# Altium PCB ElectronBot.PcbDoc
Units mil, origin at the board's own origin, x right, y up, seen from the top; angles counter-clockwise.
Board outline 1479.69 x 1548.74 mil, 2 copper layers (Top1, Bottom2), stack 42.17 mil thick; 69 components, 72 nets, 328 pads, 93 vias.
Unrouted connection lines stored in the file: 11.
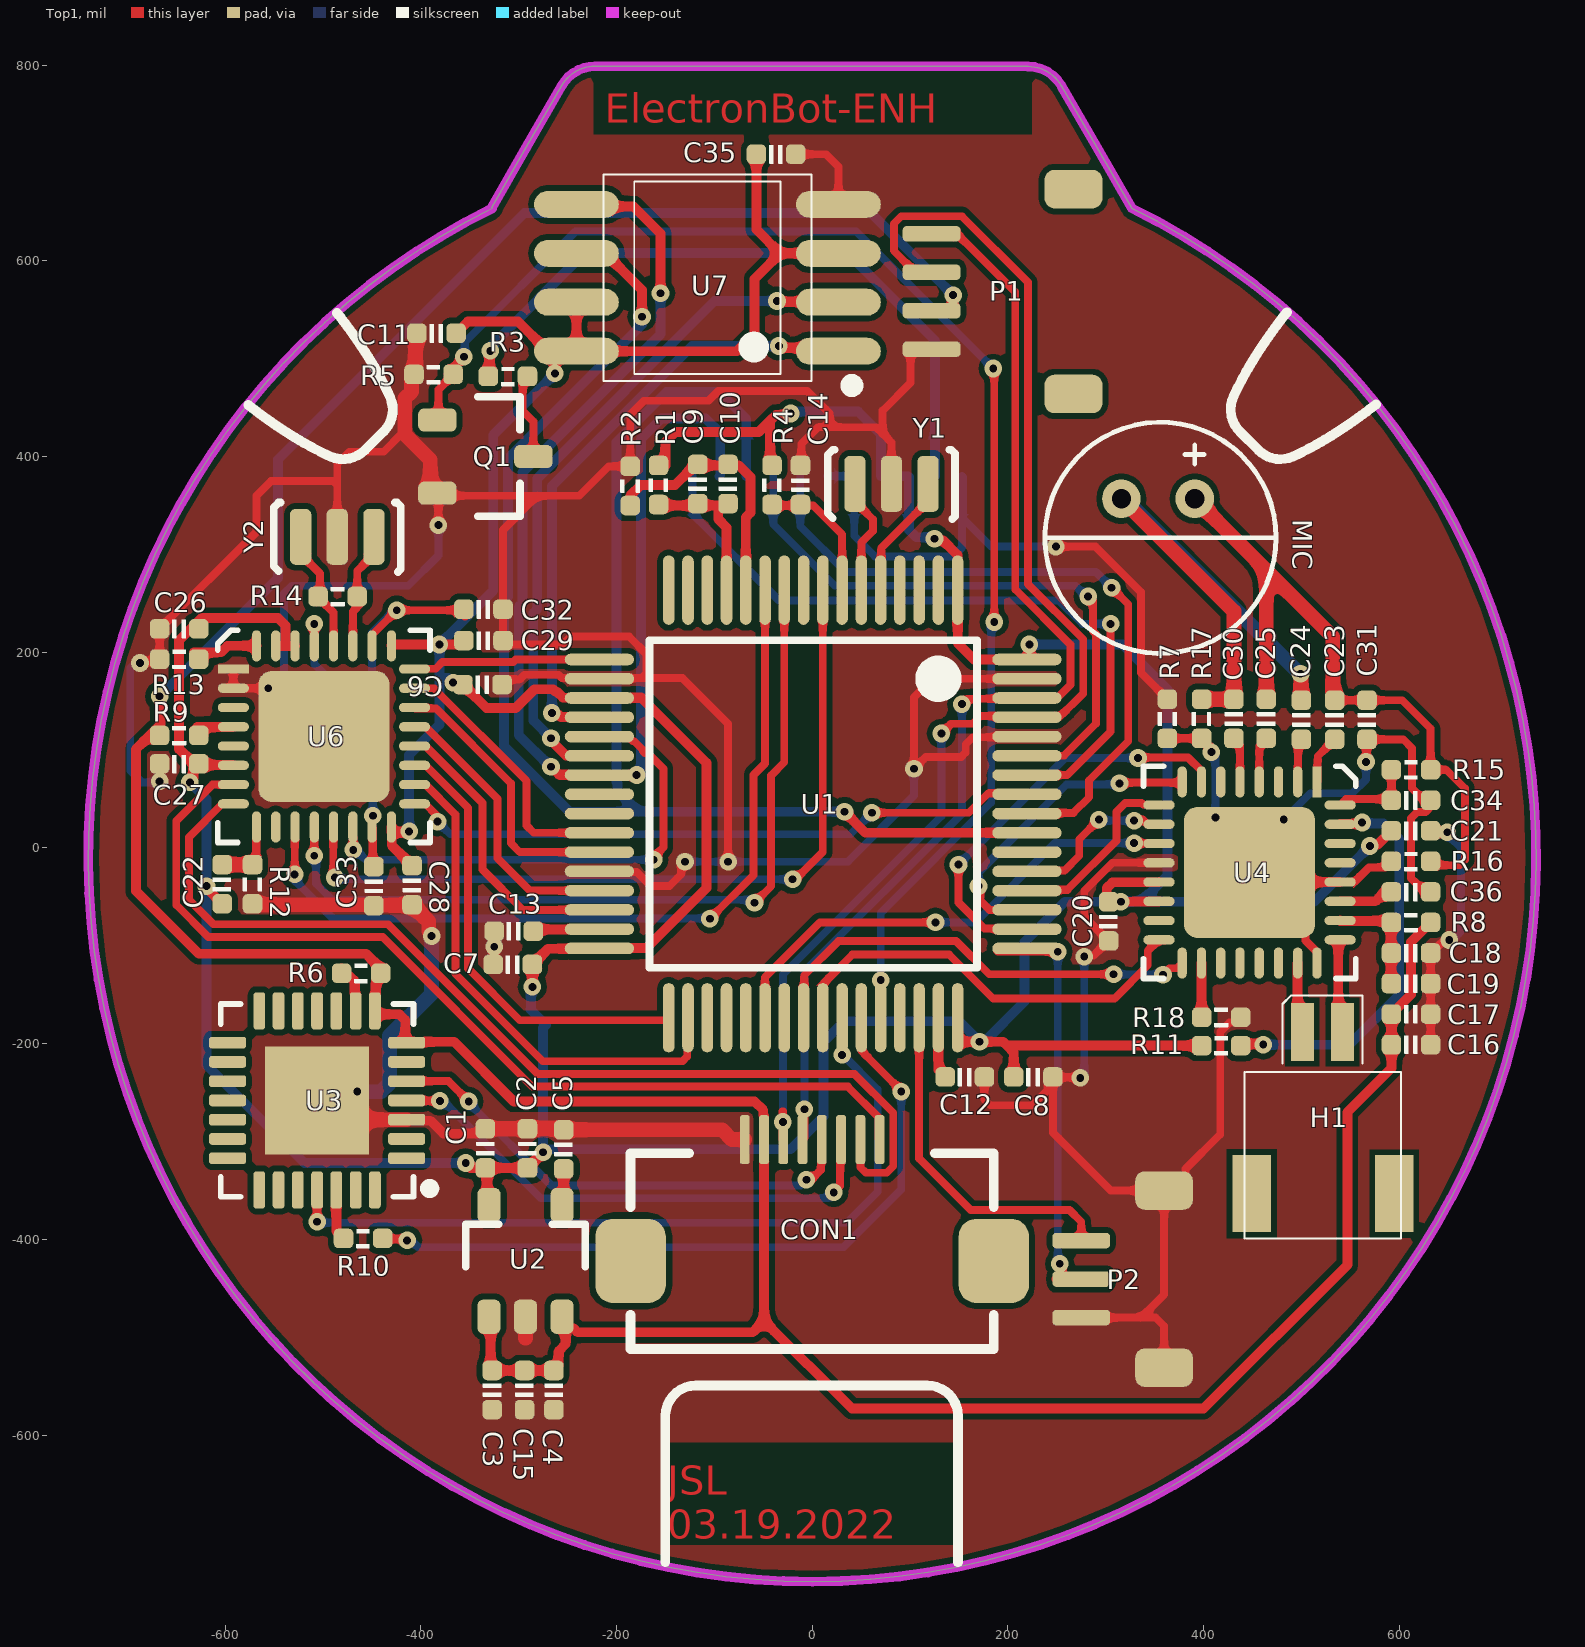
[diagram p0: Top1 view]
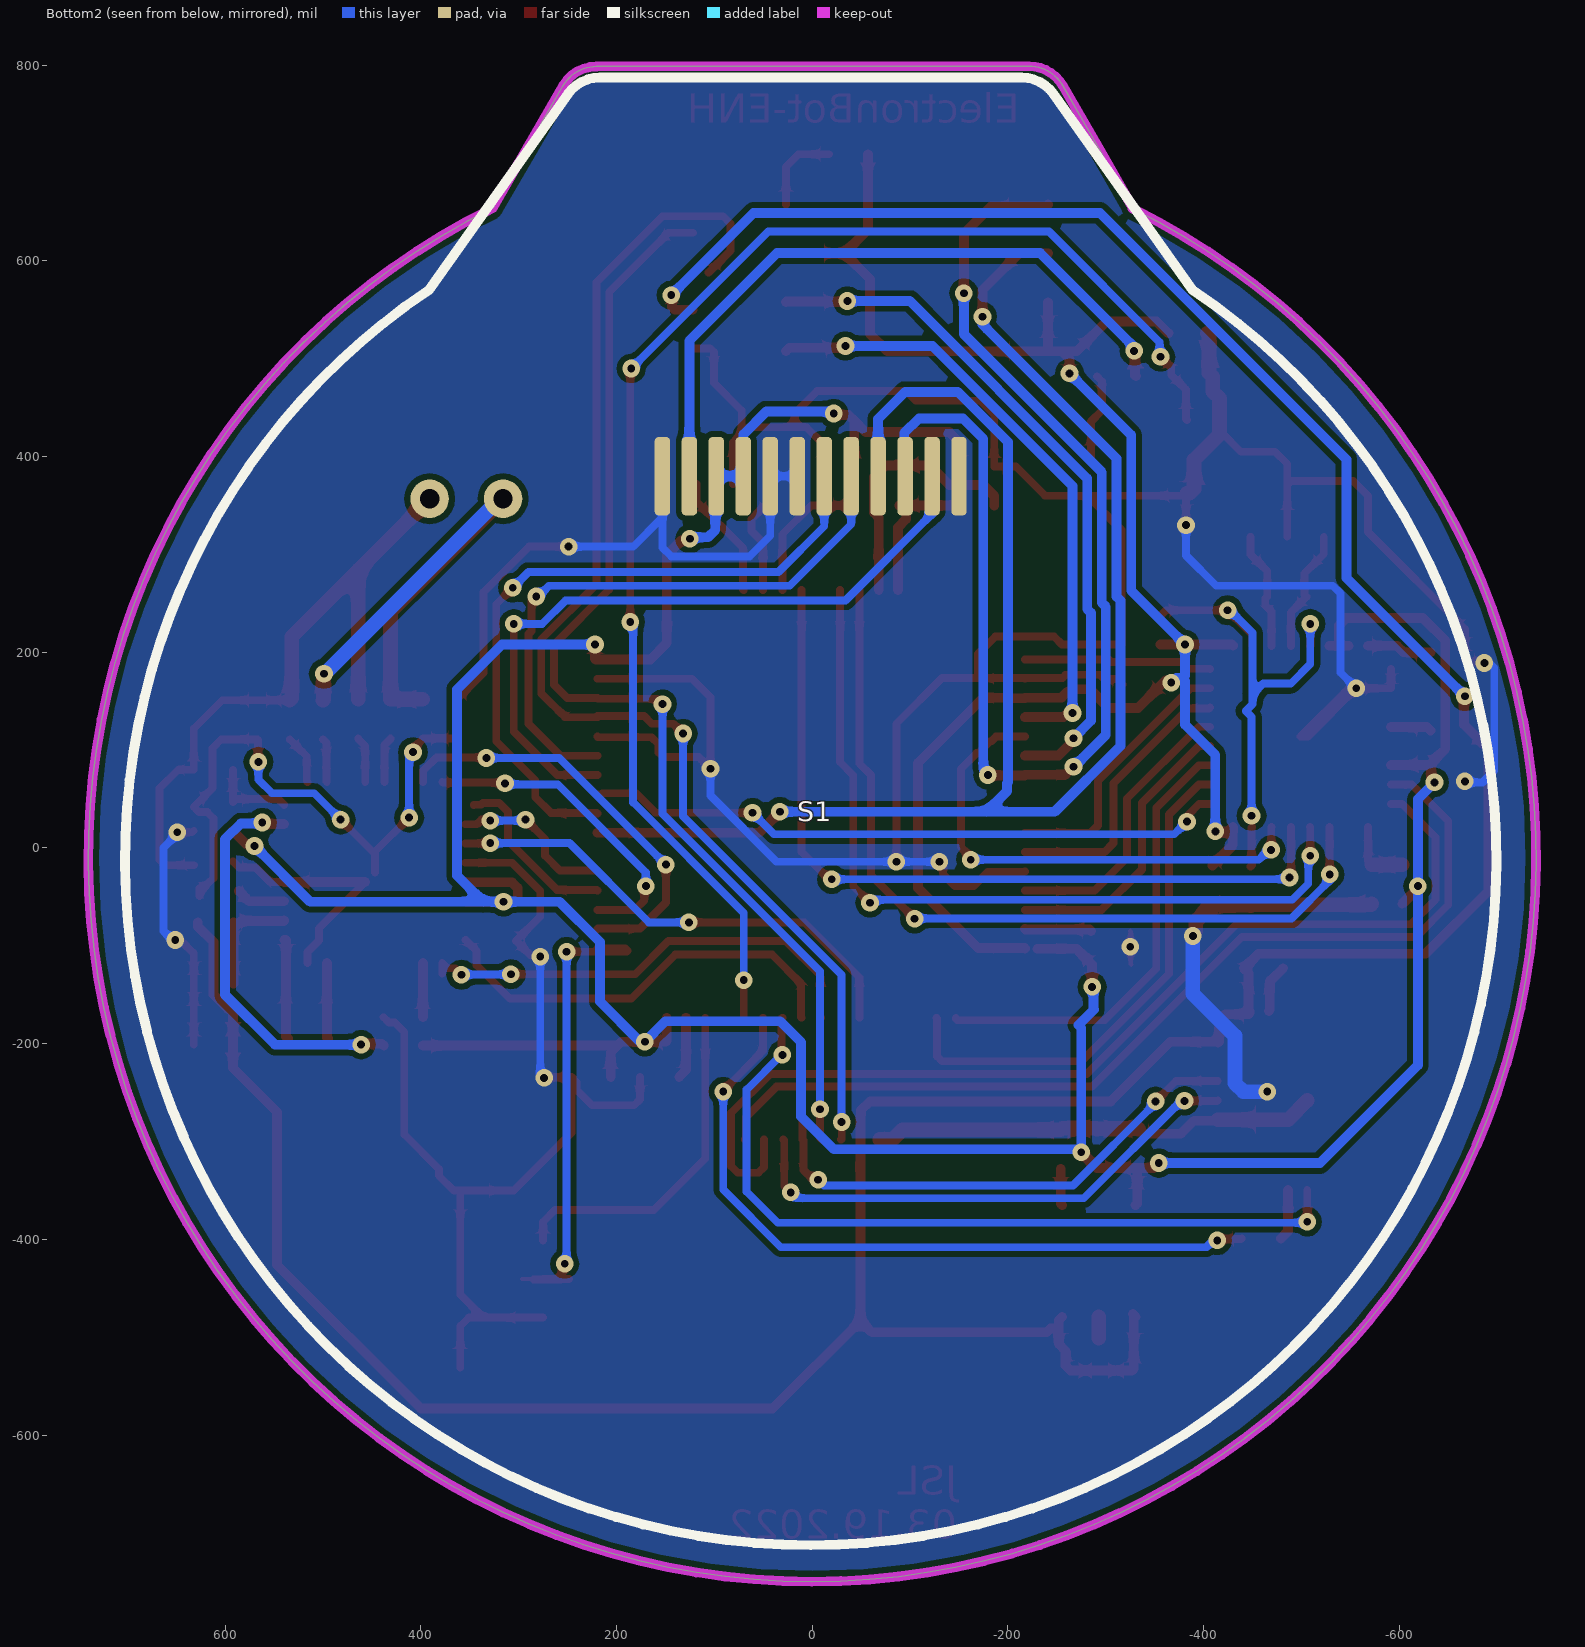
[diagram p1: Bottom2 view, seen from below]

## Layer stack, top to bottom
Top Solder: solder mask 0.4, Solder Resist, Dk 3.5
Top1: signal copper 1.4
Dielectric 1: prepreg 39.3701, PP-006, Dk 4.1
Bottom2: signal copper 1.4
Bottom Solder: solder mask 0.4, Solder Resist, Dk 3.5

## Board outline
-327.58,654.33 -292.13,716.15 -256.03,779.09 cw(c-221.88,759.5) -221.87,798.87 220.56,798.71 cw(c220.54,759.34) 254.64,779.01 290.88,716.22 326.65,654.22 326.51,653.93 cw(c0,-10)

## Design rules (kind name [scope] priority, off if disabled: settings)
Clearance Clearance_Logo [InNetClass('Logo')] p1: gap=8 ignorepadtopadclearanceinfootprint=FALSE
Clearance [All] p2: gap=5 ignorepadtopadclearanceinfootprint=FALSE
ComponentClearance [All] p1: gap=0 collisioncheckmode=3 verticalgap=0 showdistances=FALSE
DiffPairsRouting [All] p1: maxlimit=9 minlimit=9 mostfreqgap=9 toplayer_minwidth=15 toplayer_maxwidth=15 toplayer_prefwidth=15 bottomlayer_minwidth=15 bottomlayer_maxwidth=15 bottomlayer_prefwidth=15 maxuncoupledlength=500
FanoutControl Fanout_BGA [All] p1: bgadir=Out bgaviamode=Centered fanoutstyle=Auto fanoutdirection=Alternating viagrid=1 // Fanout_BGA (Default Rule)
HoleSize [All] p1: absolutevalues=TRUE maxlimit=10000 minlimit=8 maxpercent=80.000 minpercent=20.000
MinimumSolderMaskSliver [All] p1 off: minsoldermaskwidth=2
PlaneClearance [All] p1: clearance=8
PlaneConnect [All] p1: planeconnectstyle=Direct reliefexpansion=20 reliefentries=4 reliefconductorwidth=10 reliefairgap=10
PolygonConnect [All] p1: connectstyle=Direct reliefconductorwidth=10 reliefentries=4 polygonreliefangle="90 Angle" airgapwidth=10
RoutingVias [All] p1: holewidth=8 width=16 viastyle="Through Hole" minholewidth=6 minwidth=12 maxholewidth=28 maxwidth=50
SilkToSilkClearance [All] p1: silktosilkclearance=0
SilkToSolderMaskClearance [IsPad] p1: minsilkscreentomaskgap=0 clearancetoexposedcopper=TRUE
SolderMaskExpansion [All] p1: expansion=3
Width Logo [InNetClass('Logo')] p1: maxlimit=100 minlimit=0.1 preferedwidth=10
Width GND [(InNet('AGND') OR InNet('GND'))] p2: maxlimit=50 minlimit=4 preferedwidth=10
Width VCC [(InNet('VDD_SYS_3.3V') OR InNet('VDD_AV_3.3V') OR InNet('VDD_5V') OR InNet('VDD1V2-SYS') OR InNet('VDD1V1-EPHY') OR InNet('VDD-CPUX') OR InNet('VDD-CPUS') OR InNet('VDD-CPUFB') OR InNet('VCC-DRAM'))] p3: maxlimit=50 minlimit=4 preferedwidth=10
Width [All] p4: maxlimit=10000 minlimit=4 preferedwidth=4
21 further rules are at their usual default settings.

## Components (designator, comment, footprint, x,y, rotation, side; value= is the part's Value field where it differs from the comment)
C1 "0.1uF" CAP_0402 -334,-307 r270 top value=0.1u
C2 "10uF" CAP_0402 -291,-307 r270 top value=0.1u
C3 "10uF" CAP_0402 -327,-554 r90 top value=0.1u
C4 "0.1uF" CAP_0402 -264,-554 r90 top value=0.1u
C5 "10nF" CAP_0402 -254,-308 r270 top value=0.1u
C6 "0.1uF" CAP_0402 -337,167 r180 top value=0.1u
C7 "0.1uF" CAP_0402 -306,-119 r0 top value=0.1u
C8 "0.1uF" CAP_0402 226,-234 r180 top value=0.1u
C9 "0.1uF" CAP_0402 -117,372 r270 top value=0.1u
C10 "10uF" CAP_0402 -86,372 r270 top value=0.1u
C11 "0.1uF" CAP_0402 -384,526 r0 top value=0.1u
C12 "10uF" CAP_0402 156,-234 r180 top value=0.1u
C13 "10uF" CAP_0402 -305,-85 r0 top value=0.1u
C14 "0.1uF" CAP_0402 -12,371 r270 top value=0.1u
C15 "10uf" CAP_0402 -294,-554 r270 top value=0.1u
C16 "10uf" CAP_0402 612,-201 r0 top value=0.1u
C17 "0.1uF" CAP_0402 612,-169.78 r0 top value=0.1u
C18 "10uf" CAP_0402 612,-107.33 r180 top value=0.1u
C19 "0.1uF" CAP_0402 612,-138.56 r180 top value=0.1u
C20 "10uf" CAP_0402 303,-75 r90 top value=0.1u
C21 "0.1uF" CAP_0402 612,17.56 r180 top value=0.1u
C22 "10nF" CAP_0402 -603,-37 r90 top value=0.1u
C23 "1uF" CAP_0402 534,131 r90 top value=0.1u
C24 "1uF" CAP_0402 500,131 r90 top value=0.1u
C25 "1uF" CAP_0402 464,132 r90 top value=0.1u
C26 "0.1uF" CAP_0402 -647,224 r180 top value=0.1u
C27 "0.1uF" CAP_0402 -647,86 r180 top value=0.1u
C28 "0.1uF" CAP_0402 -409,-38 r270 top value=0.1u
C29 "0.1uF" CAP_0402 -336,212 r0 top value=0.1u
C30 "1uF" CAP_0402 431,132 r90 top value=0.1u
C31 "220pf" CAP_0402 567,131 r90 top value=0.1u
C32 "10uF" CAP_0402 -336,244 r0 top value=0.1u
C33 "0.1uF" CAP_0402 -448,-39 r270 top value=0.1u
C34 "10uF" CAP_0402 612,48.78 r0 top value=0.1u
C35 "0.1uF" CAP_0402 -37,709 r0 top value=0.1u
C36 "10uF" CAP_0402 612,-44.89 r0 top value=0.1u
CON1 "FFC_0.5_8" FFC_0.5_8 0,-387 r0 top
H1 "HEADER-2P" header2p_1.0 521.96,-309.06 r0 top
MIC "MIC" MIC6*2.2 356,317 r0 top (schematic designator U5)
P1 "SH1.0-4P" SH1.0-4P 122,568.69 r90 top
P2 "SH1.0-3P-STAND" SH1.0-3P-STAND 275,-440.63 r90 top
Q1 "AO3400A" SOT23-3 -334,400 r0 top
R1 "0R" RES_0402 -157,371 r90 top value=22R
R2 "0R" RES_0402 -186,370 r90 top value=22R
R3 "10R" RES_0402 -311,482 r180 top value=22R
R4 "10K" RES_0402 -41,371 r90 top value=22R
R5 "10K" RES_0402 -387,484 r0 top value=22R
R6 "10K" RES_0402 -461,-128 r180 top value=22R
R7 "0R" RES_0402 363,132 r90 top value=22R
R8 "0R" RES_0402 612,-76.11 r0 top value=22R
R9 "0R" RES_0402 -647,115 r0 top value=22R
R10 "200R" RES_0402 -459,-399 r180 top value=22R
R11 "0R" RES_0402 418,-202 r180 top value=22R
R12 "10K" RES_0402 -572,-37 r270 top value=22R
R13 "12K" RES_0402 -647,193 r180 top value=22R
R14 "1M" RES_0402 -485,257 r0 top value=22R
R15 "680R" RES_0402 612,80 r180 top value=22R
R16 "47K" RES_0402 612,-13.67 r180 top value=22R
R17 "0R" RES_0402 398,132 r270 top value=22R
R18 "10K" RES_0402 418,-173 r0 top value=22R
S1 "LCD-240x240-ROUND" LCD-240x240-ROUND 1.54,62.44 r0 bottom
U1 "STM32F405RGT6" LQFP-64_N 1,45 r270 top
U2 "LP2992 3V3" SOT23-5 -293,-420 r90 top
U3 "CP2102" QFN-28 -506,-258 r180 top value=Value
U4 "WM8978" QFN-32 447,-25 r270 top
U6 "USB3300-EZK-TR" QFN-32 -499,114 r0 top
U7 "W25Q256" flash -108,579 r180 top
Y1 "8MHz" 晶振-3P 81,372 r180 top
Y2 "24MHz" 晶振-3P -485.4,318 r180 top

## Footprints (in the part's own frame and the unit in brackets; to place one, negate y for a bottom-side part, rotate by r counter-clockwise, add the part's x,y. Pads: shape width x height; smd on the part's side, far side on the other; paste and mask are expansions set on the pad)
CAP_0402 [mil]
  rrect50% 20x20 smd: 1(-20,0) 2(20,0)
  silkscreen extent -7,-9 7,9, body extent -20,-10 20,10, height 20
FFC_0.5_8 [mil]
  rrect50% 72x86 smd: 0(-185.63,-35) 0(185.63,-35)
  rrect50% 10x50 smd: 1(-68.9,89) 2(-49.21,89) 3(-29.53,89) 4(-9.84,89) 5(9.84,89) 6(29.53,89) 7(49.21,89) 8(68.9,89)
  silkscreen extent -186,-125 186,75, body extent -187,-124 187,87, height 82
flash [mm]
  oval 2.2x0.7 smd: 1(-3.424,1.809) 2(-3.424,0.539) 3(-3.424,-0.731) 4(-3.424,-2.001) 5(3.376,-2.001) 6(3.376,-0.731) 7(3.376,0.539) 8(3.376,1.809)
  silkscreen extent -3.92,-2.77 2.68,2.85
header2p_1.0 [mm]
  rect 1x2 smd: 0(-1.85,-1.125) 0(1.85,-1.125)
  rect 0.6x1.5 smd: 1(-0.532,3.075) 2(0.509,3.075)
  silkscreen extent -2.03,-2.29 2.03,4.03
LCD-240x240-ROUND [mm]
  rrect50% 0.4x2.032 smd: 1(3.85,-8.066) 2(3.15,-8.066) 3(2.45,-8.066) 4(1.75,-8.066) 5(1.05,-8.066) 6(0.35,-8.066) 7(-0.35,-8.066) 8(-1.05,-8.066) 9(-1.75,-8.066) 10(-2.45,-8.066) 11(-3.15,-8.066) 12(-3.85,-8.066)
  silkscreen extent -17.8,-18.42 17.8,19.69, body extent -17.8,-18.41 17.8,19.68
LQFP-64_N [mm]
  oval 1.8x0.3 smd: 1(-5.55,3.75) 2(-5.55,3.25) 3(-5.55,2.75) 4(-5.55,2.25) 5(-5.55,1.75) 6(-5.55,1.25) 7(-5.55,0.75) 8(-5.55,0.25) 9(-5.55,-0.25) 10(-5.55,-0.75) 11(-5.55,-1.25) 12(-5.55,-1.75) 13(-5.55,-2.25) 14(-5.55,-2.75) 15(-5.55,-3.25) 16(-5.55,-3.75) 33(5.55,-3.75) 34(5.55,-3.25) 35(5.55,-2.75) 36(5.55,-2.25) 37(5.55,-1.75) 38(5.55,-1.25) 39(5.55,-0.75) 40(5.55,-0.25) 41(5.55,0.25) 42(5.55,0.75) 43(5.55,1.25) 44(5.55,1.75) 45(5.55,2.25) 46(5.55,2.75) 47(5.55,3.25) 48(5.55,3.75)
  oval 0.3x1.8 smd: 17(-3.75,-5.55) 18(-3.25,-5.55) 19(-2.75,-5.55) 20(-2.25,-5.55) 21(-1.75,-5.55) 22(-1.25,-5.55) 23(-0.75,-5.55) 24(-0.25,-5.55) 25(0.25,-5.55) 26(0.75,-5.55) 27(1.25,-5.55) 28(1.75,-5.55) 29(2.25,-5.55) 30(2.75,-5.55) 31(3.25,-5.55) 32(3.75,-5.55) 49(3.75,5.55) 50(3.25,5.55) 51(2.75,5.55) 52(2.25,5.55) 53(1.75,5.55) 54(1.25,5.55) 55(0.75,5.55) 56(0.25,5.55) 57(-0.25,5.55) 58(-0.75,5.55) 59(-1.25,5.55) 60(-1.75,5.55) 61(-2.25,5.55) 62(-2.75,5.55) 63(-3.25,5.55) 64(-3.75,5.55)
  silkscreen extent -4.25,-4.25 4.25,4.25, body extent -5.99,-5.99 5.98,5.98, height 1.6
MIC6*2.2 [mm]
  round 1 hole 0.5: 1(0.889,1.016) 2(-1.016,1.016)
  silkscreen extent -3,-3 3,3
QFN-28 [mil]
  rrect50% 38x12 smd mask+5: 1(-91.5,59.06) 2(-91.5,39.37) 3(-91.5,19.68) 4(-91.5,0) 5(-91.5,-19.68) 6(-91.5,-39.37) 7(-91.5,-59.06) 15(91.5,-59.06) 16(91.5,-39.37) 17(91.5,-19.68) 18(91.5,0) 19(91.5,19.68) 20(91.5,39.37) 21(91.5,59.06)
  rrect50% 12x38 smd mask+5: 8(-59.06,-91.5) 9(-39.37,-91.5) 10(-19.69,-91.5) 11(0,-91.5) 12(19.68,-91.5) 13(39.37,-91.5) 14(59.06,-91.5) 22(59.06,91.5) 23(39.37,91.5) 24(19.68,91.5) 25(0,91.5) 26(-19.69,91.5) 27(-39.37,91.5) 28(-59.06,91.5)
  rect 106.3x110.24 smd: 29(0,0)
  silkscreen extent -120,-99 99,99, body extent -99,-99 98,98, height 35
QFN-32 [mm]
  rect 0.81x0.239 smd paste+0 mask+0: 1(-2.351,1.75)
  rrect100% 0.81x0.239 smd paste+0 mask+0: 2(-2.351,1.25) 3(-2.351,0.75) 4(-2.351,0.25) 5(-2.351,-0.25) 6(-2.351,-0.75) 7(-2.351,-1.25) 8(-2.351,-1.75) 17(2.351,-1.75) 18(2.351,-1.25) 19(2.351,-0.75) 20(2.351,-0.25) 21(2.351,0.25) 22(2.351,0.75) 23(2.351,1.25) 24(2.351,1.75)
  rrect100% 0.239x0.81 smd paste+0 mask+0: 9(-1.75,-2.351) 10(-1.25,-2.351) 11(-0.75,-2.351) 12(-0.25,-2.351) 13(0.25,-2.351) 14(0.75,-2.351) 15(1.25,-2.351) 16(1.75,-2.351) 25(1.75,2.351) 26(1.25,2.351) 27(0.75,2.351) 28(0.25,2.351) 29(-0.25,2.351) 30(-0.75,2.351) 31(-1.25,2.351) 32(-1.75,2.351)
  rrect20% 3.4x3.4 smd paste-1000 mask+0: 33(0,0)
  silkscreen extent -2.76,-2.76 2.76,2.76, body extent -2.51,-2.51 2.51,2.51, height 0.85
RES_0402 [mil]
  rrect50% 20x20 smd: 1(-20,0) 2(20,0)
  silkscreen extent -7,-10 7,10, body extent -20,-10 20,10, height 14
SH1.0-3P-STAND [mm]
  rrect50% 0.4x1.5 smd: 1(-1,0) 2(0,0) 3(1,0)
  rrect50% 1x1.5 smd: SH1(-2.3,-2.15) SH2(2.3,-2.15)
  body extent -2.5,-2.91 2.5,0.69, height 4.25
SH1.0-4P [mm]
  rrect50% 0.4x1.5 smd: 1(-1.5,0) 2(-0.5,0) 3(0.5,0) 4(1.5,0)
  rrect50% 1x1.5 smd: SH1(-2.659,-3.683) SH2(2.659,-3.683)
  body extent -3,-4.42 3,0.54, height 3.14
SOT23-3 [mm]
  rrect50% 1x0.6 smd: 1(-1.246,0.95) 2(-1.246,-0.95) 3(1.246,0)
  silkscreen extent -0.2,-1.55 0.9,1.55, body extent -1.3,-1.45 1.5,1.45, height 1.2
SOT23-5 [mm]
  rrect50% 0.889x0.6 smd: 1(-1.5,0.95) 2(-1.5,0) 3(-1.5,-0.95) 4(1.396,-0.95) 5(1.396,0.95)
  silkscreen extent -0.2,-1.55 0.9,1.55, body extent -1.48,-1.45 1.32,1.45, height 1.2
晶振-3P [mm]
  rrect50% 0.55x1.45 smd: 1(-0.95,0) 2(0,0) 3(0.95,0)
  silkscreen extent -1.65,-0.89 1.65,0.91, body extent -1.6,-0.89 1.65,0.89, height 0.7

## Part data
C1 C2 C3 C4 C5 C6 C7 C8 C9 C10 C11 C12 C13 C14 C15 C16 C17 C18 C19 C20 C21 C22 C23 C24 C25 C26 C27 C28 C29 C30 C31 C32 C33 C34 C35 C36: library part 电容-0402, "Capacitor"
CON1: "FFC"
P2: "Header"
Q1: "N-MOS"
R1 R2 R3 R4 R5 R6 R7 R8 R9 R10 R11 R12 R13 R14 R15 R16 R17 R18: library part 电阻-0402, "Resistor"
S1: "显示屏"
U1: "ARM Cortex-M4 32-bit MCU+FPU, 210 DMIPS, 1024 kB Flash, 192 kB Internal RAM, 51 I/Os, 64-pin LQFP, -40 to 85 degC, Tray", I/Os (High Current)=51, Manufacturer=STMicroelectronics, Operating Frequency(F) (Processor speed) (MHz)=168, Supplier Part Number 1=497-11767-ND, Supply Voltage(Vcc) max (V)=3.6, Supply Voltage(Vcc) min (V)=1.8, ComponentLink1Description="Manufacturer URL", ComponentLink1URL=http://www.st.com/web/en/home.html, ComponentLink2Description=Datasheet, ComponentLink2URL=http://www.st.com/st-web-ui/static/active/en/resource/technical/document/datasheet/DM00037051.pdf, ComponentLink3Description="Package Specification", ComponentLink3URL=http://www.st.com/st-web-ui/static/active/en/resource/technical/document/datasheet/DM00037051.pdf, Core="ARM Cortex-M4", D/A Converter=2x12-bit, DatasheetVersion="Rev. 4", FLASH Size (Prog) (kB)=1024, Internal RAM Size (kB)=192, Mounting Technology="Surface Mount", PackageDescription="64-Pin Low Profile Quad Flat Package, 10 x 10 mm Body, 0.5 mm Pitch", PackageReference=LQFP64, PackageVersion="Rev. 4, 06/2013", Packing=Tray, PartNumber=STM32F405RGT6, Supplier 1=Digi-Key, Supplier 2=Farnell, Supplier 3=Newark, Supplier 4=Mouser, Supplier Part Number 2=2064363, Supplier Part Number 3=73T2329, Supplier Part Number 4=511-STM32F405RGT6
U2: library part LP2992, "LDO"
U3: "USBתTTL", MFG #1="SILICON LABS", PART DESC="SINGLE-CHIP USB TO UART BRIDGE, QFN28, RoHS.", PART NUMBER=CP2102, RefDes=RefDes, Type=DEV
U7: "W25Q256-QFN8"
Y1 Y2: library part 晶振-3Pin, "村田贴片"

## Via types
v1: diameter 18, hole 8, Top1 to Bottom2, 93 vias

## Nets (pads, with @x,y where several pads share a name; then routed paths per layer and width w, separated by ;. In a path a pad name is that pad's centre, name@x,y a point inside that pad or via, vN(x,y) a via of type N, cw(c..) or ccw(c..) an arc to the next point about the centre after c; other vN are vias at no path point)
AGND: C9.1 C10.1 R2.1 U1.12 | length 258.8
  Top1 w10: R2.1 -186,360 -175,371 -140.14,371 -120.14,391 C10.1@-96,391 ; C10.1 -85,391 -75,391 -63,379 -63,342.71 -67.9,337.81 U1.12
AVCC: C9.2 C10.2 R1.1 U1.13 | length 151
  Top1 w10: R1.1@-150,350 C10.2@-96,350 ; C10.2@-89,350 C10.2@-96,350 ; U1.13 -87.58,327.58 -96,336 C10.2@-96,350
FLASH_CS_1: U1.20 U7.1 | length 636.5
  Top1 w10: v1(-266,138) -264.47,136.47 -259.47,136.47 -256.93,133.93 -217.85,133.93 U1.20 ; v1(-34,513) -31.84,513 -29.96,511.12 23.44,511.12 U7.1
  Bottom2 w10: v1(-266,138) -266,370 -123,513 v1(-34,513)
FLASH_MISO_1: U1.22 U7.2 | length 716.4
  Top1 w10: v1(-267,112.13) -267,109.87 -251.69,94.56 -217.85,94.56 U1.22 ; v1(-36,559) -35.38,558.38 26.18,558.38 U7.2
  Bottom2 w10: v1(-267,112.13) -285,130.13 -285,240.36 -281,244.36 -281,377.79 -99.79,559 v1(-36,559)
FLASH_MOSI_1: S1.10 U1.23 U7.5 | length 1299.9
  Top1 w10: v1(-267,83) -258.87,74.87 -217.85,74.87 U1.23 -217.16,74.18 -177.07,74.18 -177.07,74.53 -177.07,75 -177.54,74.53 v1(-179.51,74.53) ; U7.5 -238.69,655.54 -182.61,655.54 -155,627.94 v1(-155,567)
  Bottom2 w10: v1(-267,83) -267.46,83 -300,115.54 -300,246.57 -296,250.57 -296,384 -155,525 v1(-155,567) ; v1(-179.51,74.53) -179.51,76.49 -174.86,81.14 -174.86,418.14 -154,439 -109,439 -94,424 -94,380.91 S1.10
FLASH_SCK_1: S1.9 U1.55 U7.6 | length 1788.8
  Top1 w10: U7.6 -211.39,607.76 -174,570.38 v1(-174,543) ; v1(33,37) 54.53,15.47 U1.55
  Bottom2 w10: v1(-174,543) -174,535 -311,398 -311,256.79 -315,252.79 -315,104.13 -247.87,37 -178,37 ; S1.9 -67.35,438.35 -95,466 -148.79,466 -200,414.79 -200,67.13 -199,66.13 -199,58 -178,37 ; v1(33,37) -178,37
GND: C1.1 C2.1 C3.1 C4.1 C5.1 C6.1 C7.1 C8.1 C11.1 C12.1 C13.1 C14.1 C15.2 C16.2 C17.2 C18.1 C19.1 C20.1 C21.1 C26.2 C27.2 C28.2 C29.2 C32.2 C33.2 C35.2 CON1.1 P1.1 P2.1 P2.SH1 P2.SH2 Q1.2 R2.2 R5.1 R7.2 R12.2 R13.2 R18.2 S1.1 S1.5 S1.6 S1.12 U1.18 U1.28 U1.60 U1.63 U2.2 U3.3 U3.29 U4.12 U6.1 U6.2 U6.33 U7.4 Y1.2 Y2.2 | length 6690.4
  Top1 w5: C1.1 C1.1@-333.5,-287.5 ; C7.1 -325.5,-118.5 -325.5,-85.5 C13.1
  Top1 w8: v1(-687,189) -685.09,190.91 -669.09,190.91 R13.2 C26.2 -568,323 -568,360 -553,375 -489.4,375 -485.4,371 ; U6.1 U6.2 v1(-556,163.21) ; Y2.2 -485.4,371 ; -420,423 -438,405 -473,405 -485.4,392.6 -485.4,371 ; Q1.2 Q1.2@-382,361.54 ; v1(-382,330) Q1.2@-382,361.54 ; C6.1 -311.62,172.38 -298.62,172.38 -294,177 -259,177 -255.68,173.68 -218.23,173.68 U1.18 -216.77,173.68 -174.32,173.68 ; U1.28 -216.77,-24.63 -179.37,-24.63 -165,-39 -146,-39 -134,-27 -134,-18 v1(-130,-14) ; v1(-86,-14) -86,127 -132.68,173.68 -174.32,173.68 ; C35.2 14,709 26.8,696.2 U7.4 ; C14.1 -11,392 -11,413 6,430 18,430 ; Y1.2 81,414.24 72,423.24 ; P1.1@122,510.63 104.28,510.63 100.41,506.76 100.41,475.41 72,447 72,423.24 ; C12.1 176,-257 182,-263 225,-263 240.62,-247.38 240.62,-239.38 C8.1 ; U1.60 218.77,113.17 164.17,113.17 157,106 157,97.69 152.31,93 116,93 v1(104,81) 104,154 122.95,172.95 U1.63 ; C8.1@248,-238 C8.1@246,-236 ; v1(249,308) 289.46,308 336,261.46 336,179 R7.2 ; v1(274,-235) 273.5,-234.5 246.5,-234.5 C8.1 ; P2.1 336,-480 ; v1(278,-111) 279,-110 287.46,-110 302.46,-95 C20.1@302.46,-94.46 ; C20.1 C20.1@302.46,-94.46 ; U4.12 306.84,-15.16 278,-44 278,-70 C20.1@302.46,-94.46 ; P2.SH1 359.65,-488.65 351,-480 336,-480 ; R18.2 432.62,-178.38 426.62,-178.38 417,-188 417,-292.73 381.57,-328.16 381.57,-334.84 366.33,-350.08 P2.SH2 ; C16.2 C17.2 C19.1 C18.1 632.54,-107.33 643.96,-95.91 649.09,-95.91 v1(651,-94) ; C21.1 633.56,16 v1(649,16) ; v1(-556,163.21) -548.21,163.21 U6.33 -506.79,114 v1(-556,163.21) ; Q1.2@-382,361.54 -380.46,360 -281,360 ; -281,360 -238,360 -208,390 R2.2 -186,443 -172,457 -106,457 -96,467 -5,467 18,444 18,430 ; -281,360 -316,325 -316,208 -255.23,208 -247.23,216 -187,216 -169.31,198.31 -169.31,178.69 -174.32,173.68 ; 18,430 65.24,430 72,423.24 ; C8.1@246,-236 246,-291 305.08,-350.08 P2.SH2 ; C8.1@246,-236 C8.1 ; 336,-480 359.65,-456.35 P2.SH2
  Top1 w10: U3.3 -413.5,-278.68 -390.31,-278.68 -377,-292 -339,-292 C1.1
  Top1 w15: R12.2 -571,-58 -449,-58 C33.2 -447.5,-58.5 -409.5,-58.5 C28.2 -392,-75 -392,-85 -389.57,-87.43 -389.57,-89.43 v1(-389,-90) ; U3.29 -486.31,-277.68 U3.3 ; C11.1 -405.5,524.5 -405.5,485.5 R5.1 -409.5,481.5 -409.5,466.5 -416.33,459.67 -416.33,423 -390.24,396.91 -390.24,366.91 -385.93,362.6 Q1.2 ; C1.1@-333.5,-287.5 -333,-287 -291.5,-287 -291,-287.5 -290,-286.5 -255.5,-286.5 C5.1@-254.5,-287.5 ; -293,-501 U2.2 ; C5.1 -92,-288 -82,-298 CON1.1
  Bottom2 w8: v1(-687,189) -692,189 -697,184 -697,79 -685,67 -668,67 v1(-667,68) ; v1(-556,163.21) -540,179.21 -540,260 -532,268 -413,268 -382,299 v1(-382,330) ; v1(-130,-14) v1(-86,-14) 36.46,-14 104,53.54 v1(104,81) ; S1.6 S1.5 42.88,319.12 64,298 144,298 153.12,307.12 S1.1 154,379.12 154,337 183,308 v1(249,308) ; v1(274,-235) 274,-234 278,-230 v1(278,-111) ; v1(649,16) 649,14.3 663,0.3 663,-85 655,-93 652,-93 v1(651,-94)
  Bottom2 w15: v1(-465,-249) -440.79,-249 -432,-240.21 -432,-192 -389,-149 v1(-389,-90)
  other v1: -325,-101
GND_ANALOG_1: C31.1 C34.2 C36.2 R7.1 R16.2 R17.2 U4.24 U4.28 U4.33 | length 867
  Top1 w8: R7.1 R17.2 398,111.46 406.09,103.37 406.09,99.91 v1(408,98) ; v1(412,31) 447,-4 U4.33@447,-6 ; U4.33 U4.33@447,-6 ; U4.33@456.84,-34.84 504.14,-82.14 504.14,-94.47 515.9,-106.23 U4.24 ; v1(482,29) U4.33@447,-6 ; U4.28 554.16,-34.84 569,-20 585.67,-20 R16.2 ; v1(566,88) 566.5,88.5 566.5,110.5 C31.1 604,111 613,102 613,61 632,42 626.62,36.62 618.19,36.62 612,30.43 612,-30.96 C36.2@626.12,-45.08 ; C36.2@626.12,-49.05 C36.2@626.12,-45.08 ; C36.2@626.12,-41.12 C36.2@626.12,-45.08
  Top1 w10: U4.33@456.84,-34.84 U4.28
  Bottom2 w8: v1(408,98) 412,94 v1(412,31) ; v1(482,29) 509,56 552,56 566,70 v1(566,88)
I2C3_SCL_1: U1.41 U4.16 | length 445.1
  Top1 w8: U1.41 11.57,-172.77 11.57,-138.43 41,-109 140,-109 185,-154 308.93,-154 343,-119.93 343,-105.33 U4.16 354.01,-93.9 U4.16@352.46,-95.45
I2C3_SDA_1: U1.40 U4.17 | length 474.3
  Top1 w8: U1.40 -8.11,-172.77 -8.11,-130.11 27,-95 147,-95 181,-129 v1(308,-129) ; v1(358.5,-129.5) 365.11,-122.89 372.78,-122.89 U4.17 U4.17@378.1,-128.21
  Bottom2 w8: v1(308,-129) 308.25,-129.25 358.25,-129.25 v1(358.5,-129.5)
I2C_SCL_1: CON1.3 P1.3 U1.61 | length 1338.2
  Top1 w8: v1(-30,-280) -30,-269 -30.26,-269 -30.26,-297.26 CON1.3 ; P1.3@106,588 83.47,610.53 83.47,638.04 91.05,645.61 152.95,645.61 220.47,578.09 220.47,269.69 276.94,213.22 276.94,157.97 252.55,133.58 U1.61 ; v1(132,117) 142,127 164,127 172,135 U1.61@219.5,135
  Bottom2 w8: v1(-30,-280) -30,-129.62 132,32.38 v1(132,117)
I2C_SDA_1: CON1.4 P1.4 U1.62 | length 1167
  Top1 w8: CON1.4 -8,-296.16 v1(-8,-267) ; P1.4@122,628.74 146.97,628.74 207.47,568.24 207.47,264.3 263.94,207.84 263.94,166.78 250.43,153.27 U1.62 218.77,152.54 158.54,152.54 v1(153,147)
  Bottom2 w8: v1(-8,-267) -8,-126 153,35 v1(153,147)
I2S3_CK_1: U1.51 U4.8 | length 328.7
  Top1 w8: v1(170,-39) 171.65,-39 171.65,-53.65 181.27,-63.27 U1.51 ; v1(314,66) 314.78,66.78 377.45,66.78 378.1,67.44 U4.8
  Bottom2 w8: v1(170,-39) 170,-25 260,65 313,65 v1(314,66)
I2S3_EXT_SD_1: U1.52 U4.9 | length 181.8
  Top1 w8: U1.52 220.23,-42.85 260.76,-42.85 311,7.38 311,37 320,46 336.46,46 338.29,44.17 345.83,44.17 U4.9@346,44
I2S3_MCLK_1: U1.38 U4.11 | length 512.5
  Top1 w8: U1.38 -48.21,-132.21 8,-76 v1(126,-76) ; v1(329,5) 329.24,4.76 354.19,4.76 U4.11 U4.11@342.87,4.53
  Bottom2 w8: v1(126,-76) 167,-76 248,5 v1(329,5)
I2S3_SD_1: U1.53 U4.10 | length 169.8
  Top1 w8: U1.53 220.23,-23.17 257.83,-23.17 273,-8 273,9 v1(293,29) ; v1(329,28) 330.2,29.2 337.83,29.2 342.82,24.21 U4.10
  Bottom2 w8: v1(293,29) 294,28 v1(329,28)
I2S3_WS_1: U1.50 U4.7 | length 432.1
  Top1 w8: v1@151,-17 v1(149.5,-17) 149.5,-55.79 175.93,-82.22 218.77,-82.22 U1.50 ; v1(333,92) 333.51,92.51 384.08,92.51 397.79,78.8 U4.7
  Bottom2 w8: v1(149.5,-17) 258.5,92 v1(333,92)
LCD_BL_1: Q1.1 R5.2 U1.44 | length 1445.4
  Top1 w8: Q1.1 -382,438.46 -382,468.46 -367,483.46 R5.2 -367,491 v1(-356,502) ; U1.44 70,-173.61 v1(70,-135) ; v1(185,490) 186,489 v1(186,231)
  Bottom2 w8: v1(-356,502) -356,503 -355,504 -355,517 -242,630 45,630 v1@183,492 ; v1(70,-135) 70,-66.38 183,46.62 183,225.29 186,228.29 v1(186,231)
LCD_CS_1: S1.8 U1.59 | length 618.9
  Top1 w8: U1.59 257.21,94.21 289.94,126.94 289.94,218.61 286.94,221.61 286.94,250.06 282,255 v1(282,257)
  Bottom2 w8: S1.8 -39.8,330.8 23,268 269,268 280,257 v1(282,257)
LCD_DC_1: S1.7 U1.56 | length 703.5
  Top1 w8: U1.56 220.23,35.89 266.89,35.89 283,52 283,69.13 323,109.13 323,249 v1(306,266)
  Bottom2 w8: S1.7 -12.24,328.78 34.54,282 290,282 v1(306,266)
LCD_LEDK_1: R3.2 S1.2 | length 700.7
  Top1 w10: R3.2 -330,483 -330,507 v1(-329,508)
  Bottom2 w10: v1(-329,508) -329,512 -233,608 36,608 125.56,518.44 S1.2
LCD_RST_1: S1.11 U1.58 | length 726.5
  Top1 w8: U1.58 260.53,74.53 305,119 v1(305,229)
  Bottom2 w8: S1.11 -122.47,341.47 -34,253 252,253 276,229 v1(305,229)
NetC5_2: C5.2 U2.4 | length 37.7
  Top1 w10: U2.4 -254,-363.46 C5.2
NetC12_2: C12.2 U1.47 | length 63.4
  Top1 w10: U1.47 128.95,-226.95 C12.2
NetC13_2: C13.2 U1.31 | length 68.3
  Top1 w10: C13.2 -283.3,-83.3 -217.85,-83.3 U1.31
NetC14_2: C14.2 R4.1 U1.7 | length 131.7
  Top1 w8: R4.1@-32,350 1,350 30.53,320.47 U1.7
NetC18_2: C18.2 C19.2 R8.1 U4.26 | length 118.5
  Top1 w10: U4.26 539.86,-74.5 583.5,-74.5 R8.1@591.5,-82.5 ; C19.2@591.5,-138.56 591.5,-107.33 R8.1@591.5,-82.5 ; R8.1@591.5,-76.11 R8.1@591.5,-82.5 ; R8.1@592,-83 R8.1@591.5,-82.5
NetC22_2: C22.2 R12.1 U6.9 | length 71.1
  Top1 w8: R12.1 -568.17,-13.17 -568.17,21.16 U6.9
  Top1 w15: C22.2 R12.1
NetC23_1: C23.1 U4.1 | length 50.9
  Top1 w8: U4.1 516.61,68.28 516.61,93.61 C23.1
NetC23_2: C23.2 C25.2 C31.2 MIC.1 R15.1 R16.1 | length 702.9
  Top1 w8: C23.2 C31.2 603,151 632,122 R15.1 648,80 667,61 667,-12 661.43,-17.57 R16.1@631.5,-17.57
  Top1 w15: MIC.1 464,284 ; C25.2 464,284 ; C23.2 532,153 532,216 464,284
NetC24_1: C24.1 U4.2 | length 45
  Top1 w8: U4.2 496.48,67.84 496.48,107.48 C24.1
NetC24_2: C24.2 C30.2 MIC.2 R17.1 | length 570.2
  Top1 w15: MIC.2 431,242 C30.2 R17.1 ; v1(499,178) 499.5,177.5 499.5,151.5 C24.2
  Bottom2 w15: MIC.2 319.19,357 498.19,178 v1(499,178)
NetC25_1: C25.1 U4.4 | length 47.4
  Top1 w8: U4.4 456.84,104.3 464,111.46 C25.1
NetC30_1: C30.1 U4.5 | length 47
  Top1 w8: C30.1 431,111.46 437.16,105.3 U4.5
NetC32_1: C32.1 C33.1 U6.15 U6.26 U6.29 | length 534.7
  Top1 w8: v1(-509,229) -512,229 -509.11,226.11 -509.11,206.84 U6.29 ; U6.15 -449,20.64 -449,-12.16 -449.52,-12.68 -449.52,-17.48 C33.1 ; U6.26 -449.79,217.8 v1(-424.58,243) -361.64,243 C32.1@-355,236.36
  Bottom2 w8: v1(-509,229) -509,188 -489,168 -461,168 -450,157 ; v1@-451.91,35.91 v1(-449,33) ; v1(-424.58,243) -425.58,242 -428,242 -450,220 -450,157 ; -450,157 -450,147 -443,140 -449,134 v1(-449,33) ; v1(-449,33) -448,34 v1(-449,33)
NetC34_1: C34.1 R15.2 U4.32 | length 89.2
  Top1 w8: U4.32 545.67,50 589,50 592,47 C34.1 R15.2
NetC36_1: C36.1 U4.27 | length 50.8
  Top1 w10: U4.27 575.47,-54.53 C36.1@586,-44
NetH1_1: H1.1 U4.23 | length 77.6
  Top1 w10: H1.1@494.87,-194.65 495.92,-193.6 495.92,-117.86 U4.23
NetH1_2: H1.2 U4.25 | length 103.2
  Top1 w10: H1.2@535.87,-194.65 537.72,-192.8 537.72,-94.19 538.01,-93.9 U4.25
NetQ1_3: Q1.3 R3.1 | length 88.7
  Top1 w8: R3.1 -296,477 -296,447 -284.94,435.94 Q1.3
NetR6_2: R6.2 U3.9 | length 49.5
  Top1 w10: R6.2@-481,-123 -467.63,-136.37 -467.63,-165.5 U3.9
NetR9_2: R9.2 U6.4 | length 42
  Top1 w10: R9.2@-632,120 -628.45,123.55 -591.86,123.55 U6.4
NetR10_2: R10.2 U3.26 | length 52.5
  Top1 w10: U3.26 -486.31,-391.68 R10.2
NetR11_1: R11.1 U4.31 | length 411.6
  Top1 w10: R11.1 440,-200 456,-200 457,-201 v1(461,-201) ; U4.31 539.86,24.5 560.5,24.5 v1(562,26)
  Bottom2 w10: v1(461,-201) 549,-201 600,-150 600,9 584,25 563,25 v1(562,26)
NetR13_1: R13.1 U6.32 | length 66.8
  Top1 w10: R13.1@-632,200 -604.14,200 -597.57,206.57 U6.32
NetR14_1: R14.1 U6.28 Y2.3 | length 127
  Top1 w8: Y2.3 -522.8,300.28 -503,280.48 -503,259 R14.1 -505,256.46 -489.16,240.62 U6.28
NetR14_2: R14.2 U6.27 Y2.1 | length 122
  Top1 w8: U6.27 -469.47,241.73 -463,248.2 -463,255 R14.2 -465,283 -448,300 Y2.1
NetR18_1: R18.1 U4.18 | length 55.5
  Top1 w10: U4.18 397.89,-117.68 397.89,-172.89 R18.1
NetU1_5: U1.5 Y1.1 | length 128.6
  Top1 w8: U1.5 70.63,264.23 70.63,306.51 118.4,354.28 Y1.1
NetU1_6: U1.6 Y1.3 | length 121
  Top1 w8: Y1.3 43.6,354.28 62,335.88 62,324 50.21,312.21 U1.6
SWCLK_1: P2.2 U1.49 | length 511
  Top1 w4: P2.2 P2.2@296.65,-440.63
  Top1 w8: U1.49@191.37,-103 U1.49@190.65,-103 ; U1.49 191.01,-102.64 U1.49@190.65,-103 ; P2.2@248.7,-440.63 P2.2@257,-440.63 ; v1(251,-106) 189.65,-106 188.65,-105 U1.49@190.65,-103 ; v1(253,-425) 253,-432 P2.2@261.63,-440.63 ; P2.2 P2.2@261.63,-440.63 ; P2.2@285,-441 P2.2@262,-441 ; P2.2@257,-440.63 P2.2@261.63,-440.63 ; P2.2@257,-440.63 257.37,-441 P2.2@262,-441 ; P2.2@261.63,-440.63 P2.2@262,-441
  Bottom2 w8: v1(251,-106) 251,-423 v1(253,-425)
SWDIO_1: P2.3 U1.46 | length 355.6
  Top1 w8: U1.46 109.27,-317.27 162,-370 263,-370 275,-382 P2.3
UART_RX_1: R10.1 U1.43 | length 751.1
  Top1 w8: R10.1 -438.5,-399.5 -414.5,-399.5 -414,-400 v1(-414,-401) ; U1.43 50.21,-207.21 91,-248 v1(91,-249)
  Bottom2 w8: v1(-414,-401) -410,-401 -403,-408 32,-408 91,-349 v1(91,-249)
UART_TX_1: U1.42 U3.25 | length 813.1
  Top1 w8: v1(-506,-382) U3.25 ; v1(30.53,-211.5) 31.26,-210.74 31.26,-174.23 U1.42
  Bottom2 w8: v1(-506,-382) -504,-382 -503,-383 35.31,-383 67,-351.31 67,-247 31.5,-211.5 v1(30.53,-211.5)
USB_CLK_1: U1.21 U6.14 | length 511.9
  Top1 w8: U6.14 -469.2,21.16 -469.2,-1.8 v1(-469,-2) ; U1.21 -187.98,113.9 -183.2,109.12 -181.8,109.12 -173.07,100.39 -173.07,98.99 -171.18,97.11 -168.06,97.11 -152,81.04 -152,0.71 -162,-9.29 v1(-162,-12)
  Bottom2 w8: v1(-469,-2) -466.29,-2 -465.29,-3 -456.29,-12 v1(-162,-12)
USB_DATA0_1: U1.17 U6.24 | length 193
  Top1 w8: U6.24 -406.16,183.17 -384.87,183.17 -378.04,190 -305.62,190 -302.98,192.64 U1.17
USB_DATA1_1: U1.26 U6.23 | length 276.8
  Top1 w8: U6.23 -386.67,163.21 -292,68.54 -292,23 -284.47,15.47 U1.26
USB_DATA2_1: U1.27 U6.22 | length 285.9
  Top1 w8: U6.22 -405.43,142.53 -384.37,142.53 -308,66.16 -308,5 -298.79,-4.21 U1.27
USB_DATA3_1: U1.29 U6.21 | length 293.8
  Top1 w8: U6.21 -395.2,123.84 -321.6,50.24 -321.6,-10.4 -288.42,-43.58 U1.29
USB_DATA4_1: U1.30 U6.20 | length 298.1
  Top1 w8: U6.20 -395.2,104.16 -337,45.95 -337,-22 -295.73,-63.27 U1.30
USB_DATA5_1: U1.33 U6.19 | length 465.3
  Top1 w8: U6.19 -395.2,84.47 -351.68,40.95 -351.68,-123.12 -298.8,-176 -148.4,-176 -146.64,-174.24 U1.33
USB_DATA6_1: U1.34 U6.18 | length 533
  Top1 w8: U6.18 -395.2,64.79 -364.68,34.26 -364.68,-128.5 -275.25,-217.94 -132.62,-217.94 -127.68,-213 -127.68,-174.23 U1.34
USB_DATA7_1: U1.57 U6.17 | length 661.5
  Top1 w8: U6.17 -395.59,45.1 -384,33.51 -384,28 v1(-383,27) ; v1(61,36) 160,36 180,56 214.66,56 217.66,53 U1.57
  Bottom2 w8: v1(-383,27) -370,14 39,14 v1(61,36)
USB_DIR_1: U1.10 U6.12 | length 847
  Top1 w8: v1(-509,-8) -508.92,-7.92 -508.92,21.35 U6.12 ; v1(-59,-56) -42,-39 -42,74.15 -28.53,87.63 U1.10
  Bottom2 w8: v1(-509,-8) -507,-10 -507,-36.46 -490.46,-53 -62,-53 v1(-59,-56)
USB_DM_CP_1: CON1.5 U3.5 | length 527.1
  Top1 w8: U3.5 -371.68,-238.32 v1(-351,-259) ; v1(-6,-339) 0,-339 0,-337.96 8.84,-329.12 8.84,-299 CON1.5 CON1.5@9.84,-278
  Bottom2 w8: v1(-351,-259) -351,-260.46 -266.46,-345 -12,-345 v1(-6,-339)
USB_DM_ST_1: CON1.7 U6.8 | length 1055.1
  Top1 w8: U6.8 -602.8,45.1 -637,10.9 -637,-52.8 -611.8,-78 -433.57,-78 -280.63,-230.94 43.1,-230.94 82.9,-270.74 82.9,-325.26 76.16,-332 55,-332 49.21,-326.21 CON1.7
USB_DP_CP_1: CON1.6 U3.4 | length 537.5
  Top1 w8: U3.4 -414,-258.5 v1(-380.5,-258.5) ; v1(22,-352) 28.53,-345.47 28.53,-299 CON1.6
  Bottom2 w8: v1(-380.5,-258.5) -376.96,-258.5 -277.46,-358 16,-358 v1(22,-352)
USB_DP_ST_1: CON1.8 U6.7 | length 990.5
  Top1 w8: U6.7 -612.76,64.79 -650,27.54 -650,-58.18 -617.18,-91 -438.95,-91 -286.02,-243.94 36.41,-243.94 67.9,-275.42 67.9,-297 CON1.8
USB_NXT_1: U1.11 U6.11 | length 854.5
  Top1 w8: v1(-529,-27) -528.76,-26.76 -528.76,21.2 U6.11 ; v1(-104.62,-72.38) -60,-27.75 -60,74.54 -48.21,86.33 U1.11
  Bottom2 w8: v1(-529,-27) -529,-32.84 -489.84,-72 -105,-72 v1(-104.62,-72.38)
USB_STP_1: U1.8 U6.13 | length 831
  Top1 w8: U6.13 -489.43,21.16 -489.43,-28.57 v1(-487.82,-30.18) ; v1(-20,-32) -17,-32 10.84,-4.16 U1.8
  Bottom2 w8: v1(-487.82,-30.18) -486,-32 v1(-20,-32)
VBUS_IN: C3.2 C4.2 C15.1 C16.1 C17.1 CON1.2 P1.2 R6.1 R8.2 R9.1 U2.1 U2.3 U3.7 U3.8 | length 3833.6
  Top1 w10: v1(-667,155) -666,154 -666,126 -691,101 -691,-44 -627,-108 -456,-108 -441,-123 -445.94,-127.94 -445.94,-165.5 U3.8 -446.94,-169 -445.94,-170 -421.86,-170 -416,-175.86 -416,-197.94 -415,-198.94 U3.7 -413.56,-198 -366,-198 -305,-259 -59,-259 -50,-268 -50,-272.87 -49.21,-273.66 CON1.2 -49.21,-483.21 ; U2.1@-327.56,-476.21 U2.1 -328.7,-480.76 -328.7,-532.3 C3.2 C15.1 C4.2 -259,-529 -259,-514 -252,-507 U2.3@-252,-487.85 ; U2.3 -252,-482.65 U2.3@-252,-487.85 ; P1.2@122,550 140.42,550 143.3,552.87 143.3,564.3 v1(144,565) v1@144,562 ; C17.1 C16.1 592,-225 547,-270 547,-426 400,-573 40.57,-573 -49.21,-483.21 ; C17.1@597,-164.78 612,-149.78 612,-96.11 628,-80.11 R8.2@628,-76 ; U2.3@-252,-487.85 -248.86,-491 -243.66,-491 -239.65,-495 -61,-495 -49.21,-483.21
  Bottom2 w10: v1(-667,155) -546,276 -546,397 -294,649 60,649 v1(144,565)
VCC_3V3: C1.2 C2.2 C6.2 C7.2 C8.2 C11.2 C20.2 C21.2 C22.1 C26.1 C27.1 C28.1 C29.1 C35.1 R1.2 R4.2 R11.2 S1.3 S1.4 U1.1 U1.19 U1.32 U1.48 U1.64 U2.5 U4.13 U4.14 U6.6 U6.16 U6.25 U6.30 U6.31 U7.3 U7.7 U7.8 | length 5895.3
  Top1 w10: v1(-636,67) -632.5,70.5 -632.5,85.5 C27.1@-632,86 ; v1(-619,-39) -619,-41 C22.1 ; U6.6 -591.86,84.76 -630.76,84.76 C27.1@-632,86 ; U6.31 -538.37,206.57 ; U6.30 -538.37,206.57 ; U6.16 -430.1,16.29 U6.16@-429.81,16 ; U6.25 -430.1,206.99 -429.1,208 v1(-381,208) C29.1@-356,208 ; v1(-412,17) -413,17 -414,16 U6.16@-429.81,16 ; C28.1 -429.81,2.81 U6.16@-429.81,16 ; v1(-367,169) -369.47,171.47 -361.47,171.47 C6.2 -333,143 -303,143 -283.77,162.23 -264.77,162.23 -262.23,159.68 -260.81,159.68 -254.74,153.61 -217.85,153.61 U1.19 -217.16,152.92 -201.7,152.92 -201,153.61 -175.39,153.61 -175,154 -108,87 -108,-41 -169.29,-102.29 -217.16,-102.29 U1.32 ; C11.2 -352,538 -300.68,538 -270.44,507.76 U7.8@-254.89,507.76 ; v1(-354.14,-322) -349.14,-327 C1.2 ; U2.5 -332.2,-363.26 -332.2,-328.8 C1.2 ; v1(-286,-142) C7.2 -270,-103 U1.32@-230.14,-103 ; v1(-275,-311) C2.2 C1.2 ; v1(-263,485) -263,499.65 U7.8@-254.89,507.76 ; U7.7 U7.8 ; R1.2@-150,391 -150,415 -140,425 -54.61,425 -43,436.61 ; C35.1 -57,632 -32.76,607.76 ; R4.2 -43,393 -43,436.61 ; v1(-22,444) -23.53,442.47 -37.14,442.47 -43,436.61 ; U7.3 -32.76,607.76 ; v1@133.53,314.47 148.64,299.36 U1.1 148.64,209.36 165.36,192.64 U1.64 221.16,192.64 222,193.47 v1(222,208) ; U1.48 148.64,-197.2 149.47,-198.03 v1(171,-198.03) 195.03,-198.03 199,-202 ; C8.2 206,-209 199,-202 ; U4.14 354.14,-54.82 328.18,-54.82 328,-55 v1(315.5,-55) C20.2 301,-53 301,-41 306.87,-35.13 354.14,-35.13 U4.13 ; R11.2 199,-202 ; v1(570,2) 571.53,3.53 577.98,3.53 C21.2 ; C27.1@-632,86 -647,101 -647,212 -624,235 -546,235 -538.37,227.37 -538.37,206.57 ; U7.8@-254.89,507.76 U7.8 ; U7.8 -76.69,507.76 -59,525.46 -59,581.53 -32.76,607.76
  Bottom2 w10: v1(-636,67) -619,50 -619,-222 -519,-322 v1(-354.14,-322) ; v1(-412,17) -412,95 -381,126 -381,171 ; v1(-367,169) -372,174 -379,174 -381,176 v1(-381,208) -326,263 -326,422 v1(-263,485) ; v1(-286,-142) -287.53,-143.53 -287.53,-164.53 -288,-165 -272,-181 -275,-184 v1(-275,-311) ; v1@-272,-308 -22.13,-308 11.53,-274.34 11.53,-198.47 33,-177 149.97,-177 v1(171,-198.03) 175.97,-198.03 217,-157 217,-96 258,-55 v1(315.5,-55) 336,-55 ; v1(-22,444) -20,446 47,446 70.44,422.56 S1.4 S1.3 99,379 99,325 106.47,317.53 123.47,317.53 v1(125,316) ; v1@225,208 317,208 363,162 363,-28 336,-55 ; v1(570,2) 513,-55 336,-55
pads on no net: CON1.0 H1.0 P1.SH1 P1.SH2 U1.2 U1.3 U1.4 U1.9 U1.14 U1.15 U1.16 U1.24 U1.25 U1.35 U1.36 U1.37 U1.39 U1.45 U1.54 U3.1 U3.2 U3.6 U3.10 U3.11 U3.12 U3.13 U3.14 U3.15 U3.16 U3.17 U3.18 U3.19 U3.20 U3.21 U3.22 U3.23 U3.24 U3.27 U3.28 U4.3 U4.6 U4.15 U4.19 U4.20 U4.21 U4.22 U4.29 U4.30 U6.3 U6.5 U6.10

## Polygon pours and split planes (outlines as drawn)
GND on Top1 "NONET_L01_P-001" (solid, remove dead copper, pour order 0): -768,820 834,820 834,-830 -768,-830
GND on Bottom2 "NONET_L01_P-001" (solid, remove dead copper, pour order 1): -766,822 834,822 834,-828 -766,-828

## Keep-outs
Keep-Out Layer:
  lines w10: -327.58,654.33 -292.13,716.15 -256.03,779.09 cw(c-221.88,759.5) -221.87,798.87 220.56,798.71 cw(c220.54,759.34) 254.64,779.01 290.88,716.22 326.65,654.22 ; -327.21,653.58 ccw(c0,-10) 326.51,653.93

## Other copper
Top1:
  text "ElectronBot-ENH" at -212,741 h30
  text "JSL   / 03.19.2022" at -148,-706 h30

## Silkscreen, mask and mechanical layers (free items; w line width, h text height)
Top Overlay:
  drawing of 343 lines, arcs and shapes, not listed
Mechanical 1:
  lines w10: -327.58,654.33 -292.13,716.15 -256.03,779.09 cw(c-221.88,759.5) -221.87,798.87 220.56,798.71 cw(c220.54,759.34) 254.64,779.01 290.88,716.22 326.65,654.22 ; -327.21,653.58 ccw(c0,-10) 326.51,653.93